# EAGLE board Bootselector (EAGLE 7.7.0)
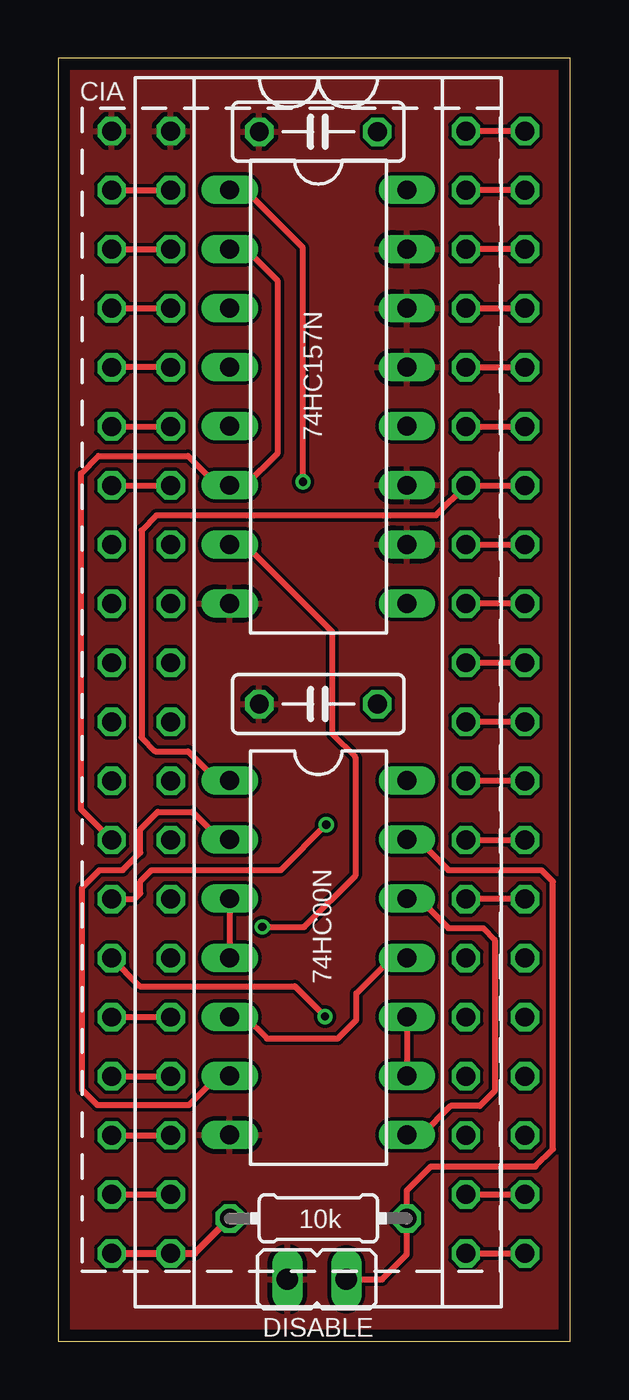
[diagram p0: board, top side]
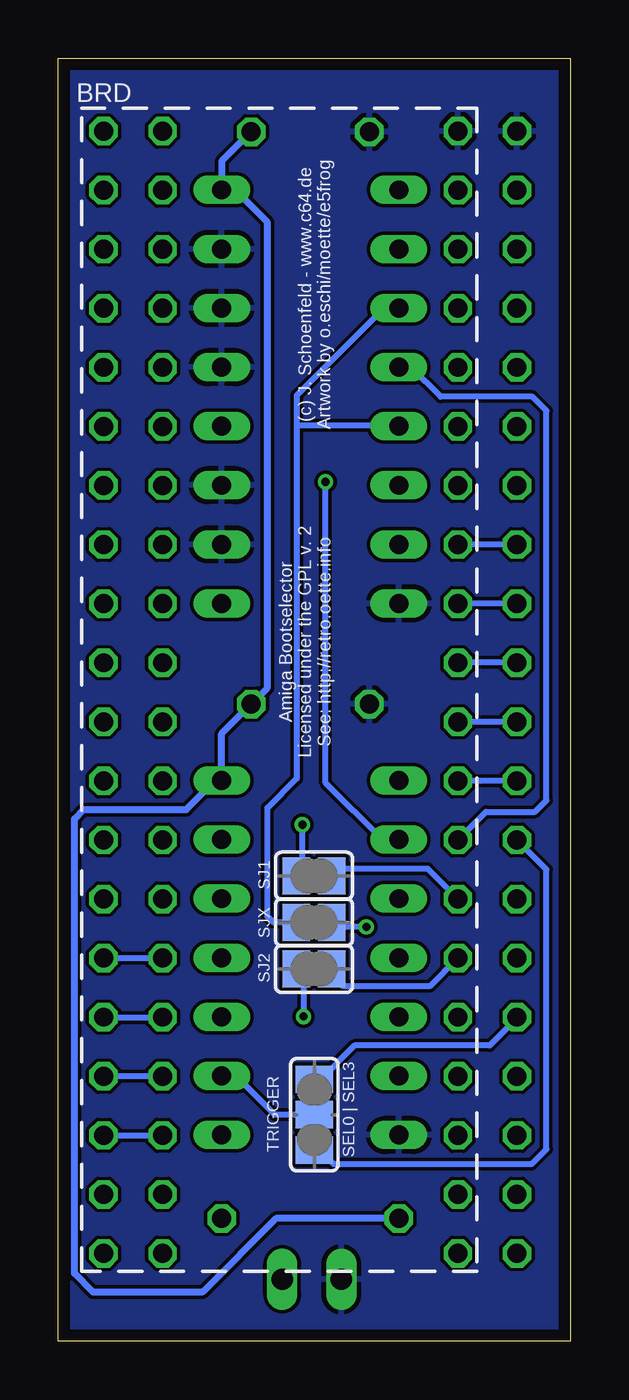
[diagram p1: board, bottom side, seen from below]

Size 22.04 x 55.17 mm. Coordinates in mm from the lower left corner, seen from the top.
Outline: 0,0 22.04,0 22.04,55.17 0,55.17 0,0
Copper layers (1*16): Top 0.035mm / dielectric 1.5mm / Bottom 0.035mm
Design rules "Eagle-DRU - 1203 - LeitOn - 01 and 02 layers": minimum track width 6mil, minimum drill 0.3mm, track to track 6mil, track to pad 6mil, pad to pad 6mil, via to via 6mil, smd to smd 6mil, copper to edge 20mil, drill to drill 10mil, minimum pad ring 8mil, minimum via ring 6mil, stop-mask expansion 3mil, vias tented up to drill 0mil, thermal gap 8mil

## Footprints (pad centres in the part's own frame; a part is rotated, then mirrored left to right if it is on the bottom)
DIP40-6 = drill 0.813 octagon: 1 -24.13,-7.62; 2 -21.59,-7.62; 3 -19.05,-7.62; 4 -16.51,-7.62; 5 -13.97,-7.62; 6 -11.43,-7.62; 7 -8.89,-7.62; 8 -6.35,-7.62; 9 -3.81,-7.62; 10 -1.27,-7.62; 11 1.27,-7.62; 12 3.81,-7.62; 13 6.35,-7.62; 14 8.89,-7.62; 15 11.43,-7.62; 16 13.97,-7.62; 17 16.51,-7.62; 18 19.05,-7.62; 19 21.59,-7.62; 20 24.13,-7.62; 21 24.13,7.62; 22 21.59,7.62; 23 19.05,7.62; 24 16.51,7.62; 25 13.97,7.62; 26 11.43,7.62; 27 8.89,7.62; 28 6.35,7.62; 29 3.81,7.62; 30 1.27,7.62; 31 -1.27,7.62; 32 -3.81,7.62; 33 -6.35,7.62; 34 -8.89,7.62; 35 -11.43,7.62; 36 -13.97,7.62; 37 -16.51,7.62; 38 -19.05,7.62; 39 -21.59,7.62; 40 -24.13,7.62
C050-025X075 = drill 0.813 octagon: 1 -2.54,0; 2 2.54,0
JP1 = drill 0.914 long: 1 0,-1.27; 2 0,1.27
DIL14 = drill 0.813 long: 1 -7.62,-3.81; 2 -5.08,-3.81; 3 -2.54,-3.81; 4 0,-3.81; 5 2.54,-3.81; 6 5.08,-3.81; 7 7.62,-3.81; 8 7.62,3.81; 9 5.08,3.81; 10 2.54,3.81; 11 0,3.81; 12 -2.54,3.81; 13 -5.08,3.81; 14 -7.62,3.81
DIL16 = drill 0.813 long: 1 -8.89,-3.81; 2 -6.35,-3.81; 3 -3.81,-3.81; 4 -1.27,-3.81; 5 1.27,-3.81; 6 3.81,-3.81; 7 6.35,-3.81; 8 8.89,-3.81; 9 8.89,3.81; 10 6.35,3.81; 11 3.81,3.81; 12 1.27,3.81; 13 -1.27,3.81; 14 -3.81,3.81; 15 -6.35,3.81; 16 -8.89,3.81
0204/7 = drill 0.813 octagon: 1 -3.81,0; 2 3.81,0
SJ = smd 1.168 x 1.6: 1 -0.762,0; 2 0.762,0
SJ_2 = smd 1.168 x 1.6: 1 -1.524,0; 2 0,0; 3 1.524,0

## Placement (x,y rotation side)
BRD  [DIP40-6]  12.46,27.91 270 top
C1  100nF  [C050-025X075]  11.19,52.01 180 top
C2  100nF  [C050-025X075]  11.19,27.4 180 top
CIA  [DIP40-6]  9.92,27.91 270 top
DISABLE  [JP1]  11.13,2.67 90 top
IC3  74HC00N  [DIL14]  11.19,16.49 270 top
IC4  74HC157N  [DIL16]  11.19,40.62 270 top
R1  10k  [0204/7]  11.19,5.29 180 top
SJ1  [SJ]  11.03,20.02 0 bottom
SJ2  [SJ]  11.03,16.02 0 bottom
SJX  [SJ]  11.03,18.02 0 bottom
TRIGGER  [SJ_2]  11.02,9.75 270 bottom

## Library data of the parts
BRD CIA = Amiga
C1 C2 R1 = rcl
DISABLE SJ1 SJ2 SJX TRIGGER = jumper
IC3 IC4 = 74xx-eu

## Nets
/NEWSEL0: BRD.13 IC4.4
/NEWSEL1: BRD.14 SJ1.2
/NEWSEL2: BRD.15 SJ2.2
/NEWSELX: IC4.7 SJX.2
/SEL0: CIA.13 IC4.2 IC4.6 TRIGGER.3
/SEL1: CIA.14 SJ1.1
/SEL2: CIA.15 SJ2.1
/SEL3: BRD.16 CIA.16 TRIGGER.1
/SELX: IC4.3 IC4.5 SJX.1
/TRGSEL: IC3.9 IC3.10 TRIGGER.2
C: BRD.40 CIA.40
CS: BRD.23 CIA.23
D0: BRD.26 CIA.26
D1: BRD.27 CIA.27
D2: BRD.28 CIA.28
D3: BRD.29 CIA.29
D4: BRD.30 CIA.30
D5: BRD.31 CIA.31
D6: BRD.32 CIA.32
D7: BRD.33 CIA.33
E: BRD.25 CIA.25
F: BRD.24 CIA.24
GND: BRD.1 C1.2 C2.2 CIA.1 DISABLE.2 IC3.7 IC4.8 IC4.10 IC4.11 IC4.13 IC4.14 IC4.15
INT: BRD.21 CIA.21
N$2: DISABLE.1 IC3.13 R1.1
N$4: IC3.8 IC3.12
N$6: IC3.3 IC3.4
PA0: BRD.2 CIA.2
PA1: BRD.3 CIA.3
PA2: BRD.4 CIA.4
PA3: BRD.5 CIA.5
PA4: BRD.6 CIA.6
PA5: BRD.7 CIA.7
PA6: BRD.8 CIA.8
PA7: BRD.9 CIA.9
PB0: BRD.10 CIA.10
PB1: BRD.11 CIA.11
PB2: BRD.12 CIA.12
PB7: BRD.17 CIA.17
PC: BRD.18 CIA.18
RESET: BRD.34 CIA.34 IC3.1
RS0: BRD.38 CIA.38
RS1: BRD.37 CIA.37
RS2: BRD.36 CIA.36
RS3: BRD.35 CIA.35
S: BRD.39 CIA.39
SELENABLE: IC3.2 IC3.6 IC4.1
TICK: BRD.19 CIA.19
TRG: IC3.5 IC3.11
VCC: BRD.20 C1.1 C2.1 CIA.20 IC3.14 IC4.16 R1.2
W: BRD.22 CIA.22

## Tracks (layer width: path | path; a pad name or v marks a point on that pad's centre or on a via)
/NEWSEL0
  Bottom 0.254: BRD.13 3.63,22.77 1.53,22.77 1.03,23.27 1.03,40.02 1.63,40.62 5.58,40.62 6.85,41.89 IC4.4
/NEWSEL1
  Bottom 0.254: BRD.14 6.14,20.32 10.27,20.32 SJ1.2
/NEWSEL2
  Bottom 0.254: SJ2.2 10.27,15.75 9.78,15.27 6.05,15.27 BRD.15
/NEWSELX  (via drill 0.35)
  Top 0.254: IC4.7 8.03,34.27 11.78,30.52 11.78,26.12 12.78,25.12 12.78,20.02 10.58,17.82 v8.78,17.82
  Bottom 0.254: SJX.2 10.03,17.78 10.03,17.52 9.73,17.82 v8.78,17.82
/SEL0
  Top 0.254: CIA.13 0.98,22.88 0.98,37.32 1.73,38.07 5.58,38.07 6.84,36.81 IC4.6 8.07,36.81 9.43,38.17 9.43,45.62 8.08,46.97 IC4.2
  Bottom 0.254: 10.53,8.52 TRIGGER.3 10.76,7.97 10.53,7.97 10.18,7.62 1.68,7.62 1.03,8.27 1.03,20.29 CIA.13
/SEL1  (via drill 0.35)
  Top 0.254: v11.53,22.22 9.58,20.27 4.03,20.27 3.53,19.77 3.53,19.27 3.28,19.02 CIA.14
  Bottom 0.254: SJ1.1 11.53,20.28 v11.53,22.22
/SEL2  (via drill 0.35)
  Top 0.254: CIA.15 3.51,15.27 10.18,15.27 v11.48,13.97
  Bottom 0.254: SJ2.1 11.48,15.7 v11.48,13.97
/SEL3
  Top 0.254: BRD.16 CIA.16
  Bottom 0.254: 10.78,11.27 TRIGGER.1 | 10.77,11.28 TRIGGER.1 | CIA.16 2.3,13.89 3.47,12.72 9.28,12.72 10.73,11.27 TRIGGER.1
/SELX
  Bottom 0.254: 11.78,39.37 11.78,40.67 8.02,44.43 IC4.3 | 11.78,39.37 11.78,24.19 13.03,22.94 13.03,18.27 12.78,18.02 SJX.1 | IC4.5 7.4,39.37 11.78,39.37
/TRGSEL
  Top 0.254: IC3.10 IC3.9
  Bottom 0.254: IC3.9 14.38,11.41 12.71,9.75 TRIGGER.2
C
  Top 0.254: BRD.40 CIA.40
CS
  Bottom 0.254: BRD.23 CIA.23
D0
  Bottom 0.254: BRD.26 CIA.26
D1
  Top 0.254: CIA.27 18.03,19.02 20.03,19.02 BRD.27
D2
  Top 0.254: BRD.28 20.03,21.52 19.99,21.56 CIA.28
D3
  Top 0.254: BRD.29 CIA.29
D4
  Top 0.254: BRD.30 CIA.30
D5
  Top 0.254: CIA.31 BRD.31
D6
  Top 0.254: BRD.32 CIA.32
D7
  Top 0.254: CIA.33 BRD.33
E
  Bottom 0.254: BRD.25 CIA.25
F
  Bottom 0.254: CIA.24 BRD.24
GND
  pour Top: 22.03,55.02 0.03,55.02 0.03,0.02 22.03,0.02
  pour Bottom: 22.03,55.02 0.03,55.02 0.03,0.02 22.03,0.02
INT
  Top 0.254: CIA.21 BRD.21
N$2
  Top 0.254: DISABLE.1 13.93,2.67 15,3.74 R1.1 15,6.49 16.03,7.52 20.53,7.52 21.28,8.27 21.28,19.77 20.78,20.27 16.78,20.27 15.47,21.57 IC3.13
N$4
  Top 0.254: IC3.12 15.51,19.03 16.78,17.77 18.28,17.77 18.78,17.27 18.78,10.77 18.13,10.12 16.88,10.12 15.64,8.87 IC3.8
N$6
  Top 0.254: IC3.3 IC3.4
PA0
  Top 0.254: CIA.2 BRD.2
PA1
  Top 0.254: CIA.3 BRD.3
PA2
  Top 0.254: CIA.4 BRD.4
PA3
  Top 0.254: BRD.5 CIA.5
PA4
  Top 0.254: CIA.6 BRD.6
PA5
  Top 0.254: CIA.7 BRD.7
PA6
  Bottom 0.254: CIA.8 BRD.8
PA7
  Bottom 0.254: CIA.9 BRD.9
PB0
  Bottom 0.254: CIA.10 BRD.10
PB1
  Bottom 0.254: CIA.11 BRD.11
PB2
  Bottom 0.254: CIA.12 BRD.12
PB7
  Top 0.254: CIA.17 BRD.17
PC
  Top 0.254: CIA.18 BRD.18
RESET
  Top 0.254: BRD.34 CIA.34 16.26,35.52 4.23,35.52 3.58,34.87 3.58,25.97 4.18,25.37 5.58,25.37 6.83,24.11 IC3.1
RS0
  Top 0.254: BRD.38 CIA.38
RS1
  Top 0.254: CIA.37 BRD.37
RS2
  Top 0.254: CIA.36 BRD.36
RS3
  Top 0.254: CIA.35 BRD.35
S
  Top 0.254: BRD.39 CIA.39
SELENABLE  (via drill 0.35)
  Top 0.254: IC3.6 6.88,11.41 5.63,10.17 1.68,10.17 1.03,10.82 1.03,19.52 1.78,20.27 2.78,20.27 3.53,21.02 3.53,22.02 4.28,22.77 5.78,22.77 6.78,21.77 7.19,21.77 IC3.2 | v10.53,36.96 10.53,47.02 8.04,49.51 IC4.1
  Bottom 0.254: IC3.2 8.09,21.57 10.53,24.02 v10.53,36.96
TICK
  Top 0.254: CIA.19 BRD.19
TRG
  Top 0.254: IC3.5 8.04,13.95 8.98,13.02 12.03,13.02 12.83,13.82 12.83,14.97 14.36,16.49 IC3.11
VCC
  Top 0.305: CIA.20 BRD.20 5.87,3.78 R1.2
  Bottom 0.305: R1.2 12.66,5.29 15.83,2.12 20.53,2.12 21.33,2.92 21.33,22.47 20.93,22.87 16.53,22.87 15.28,24.11 IC3.14 15,26.13 C2.1 13.03,28.1 13.03,48.12 14.42,49.51 IC4.16 15,50.74 C1.1
W
  Top 0.254: CIA.22 BRD.22

## Text on the board
bPlace: BRD
bNames: (c) J. Schoenfeld - www.c64.de / Artwork by o.eschi/moette/e5frog | Amiga Bootselector / Licensed under the GPL v. 2 / See: http://retro.oette.info | SEL0 | SEL3